# EAGLE board USB Switch PCB (EAGLE 8.3.2)
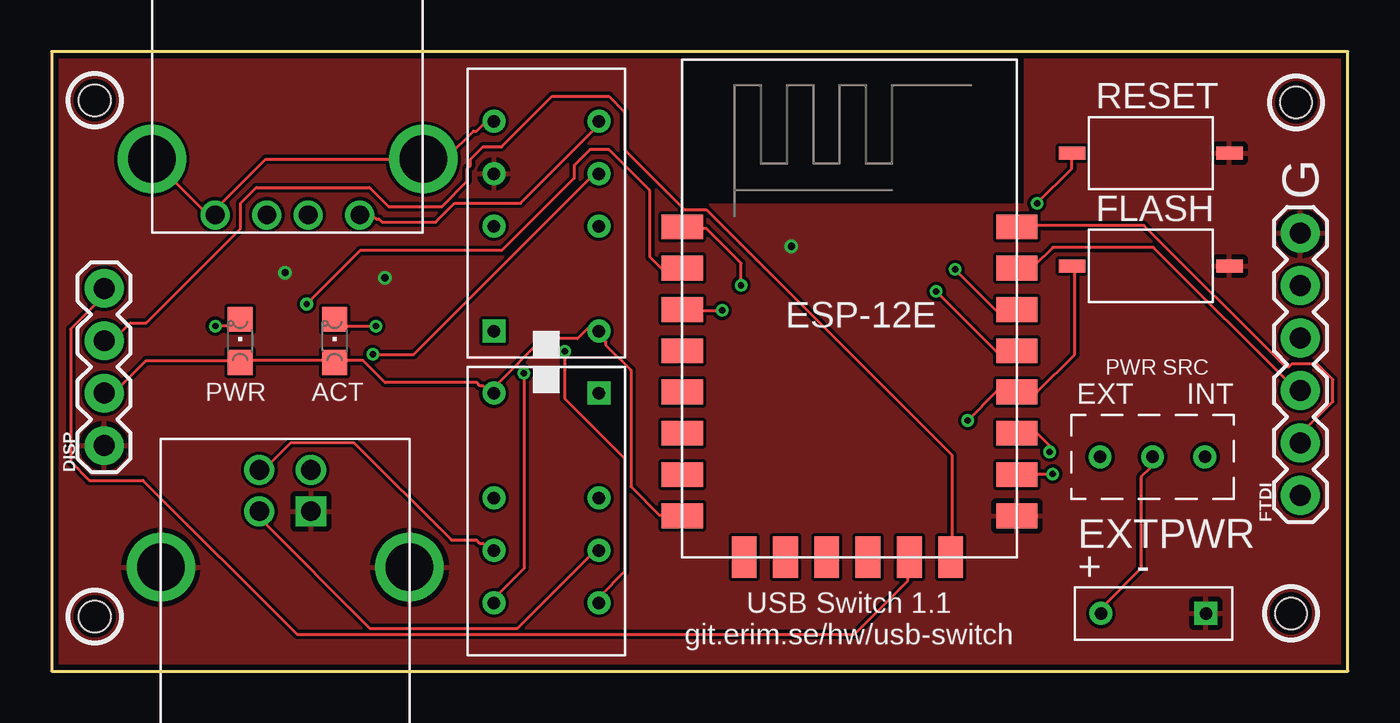
[diagram p0: board, top side]
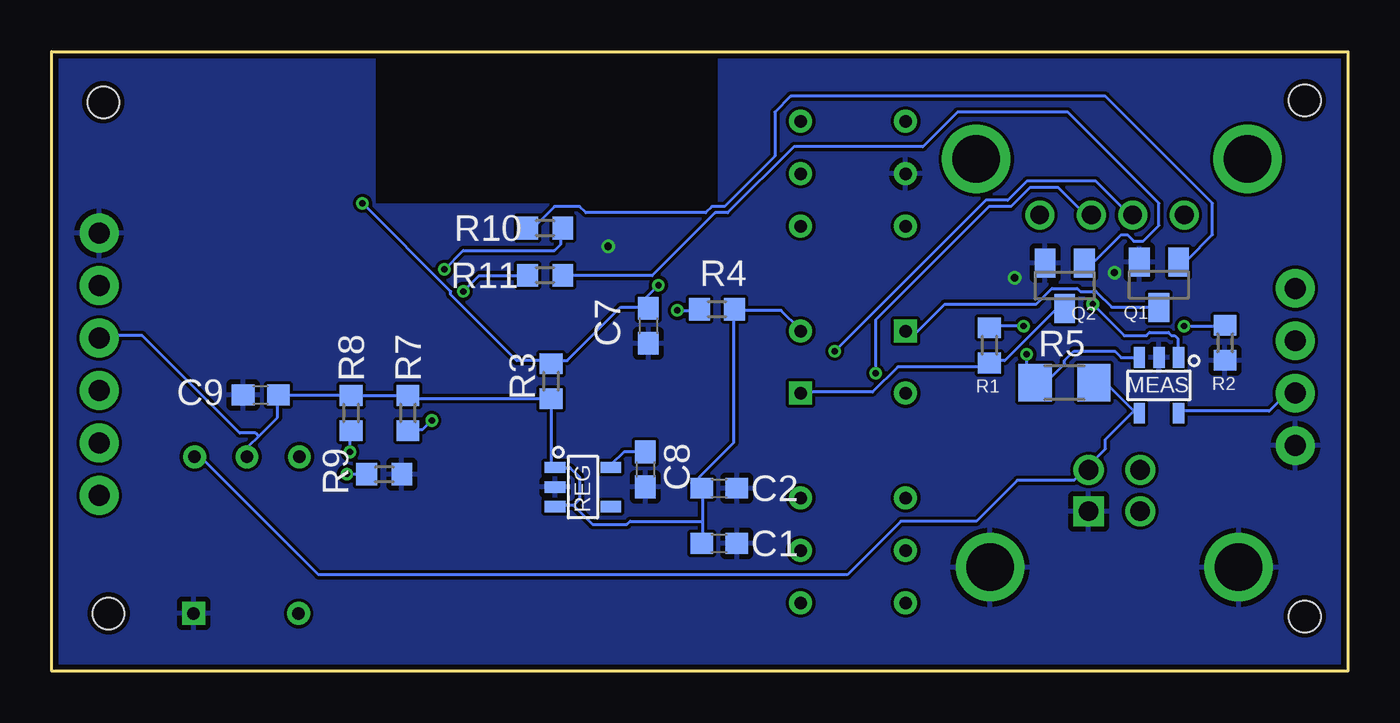
[diagram p1: board, bottom side, seen from below]

Size 62.75 x 30 mm. Coordinates in mm from the lower left corner, seen from the top.
Outline: 0,0 62.75,0 62.75,30 0,30 0,0
Copper layers (1*16): Top 0.035mm / dielectric 1.5mm / Bottom 0.035mm
Design rules "ITEADstudioDRC": minimum track width 6mil, minimum drill 12mil, track to track 6mil, track to pad 6mil, pad to pad 6mil, via to via 6mil, smd to smd 0mil, copper to edge 10mil, drill to drill 10mil, minimum pad ring 10mil, minimum via ring 6mil, stop-mask expansion 2mil, vias tented up to drill 100mil, thermal gap 10mil
Holes 1.52 mm at 2.08,27.65 59.99,2.8 2.08,2.65 60.24,27.55

## Footprints (pad centres in the part's own frame; a part is rotated, then mirrored left to right if it is on the bottom)
C0603 = smd 1.1 x 1: 1 -0.85,0; 2 0.85,0
EC2-5NU = drill 0.6: 1 2.54,-2.54; 3 2.54,2.54; 4 2.54,5.08; 5 2.54,7.62; 8 -2.54,7.62; 9 -2.54,5.08; 10 -2.54,2.54 | drill 0.6 square: 12 -2.54,-2.54
1X04 = drill 1.016 pad 1.88: 1 0,0; 2 2.54,0; 3 5.08,0; 4 7.62,0
TERMINAL-BLOCK = drill 0.6 square: N 2.54,0 | drill 0.6: P -2.54,0
MOMENTARY-SWITCH = smd 1.27 x 0.635: P$1 -3.81,0; P$2 3.81,0
1X06 = drill 1.016 pad 1.88: 1 0,0; 2 2.54,0; 3 5.08,0; 4 7.62,0; 5 10.16,0; 6 12.7,0
CHIPLED_0805 = smd 1.2 x 1.2: A 0,-1.05; C 0,1.05
ESP8266-ESP12E = smd 2 x 1.2: 1 -7.62,5.84; 2 -7.62,3.84; 3 -7.62,1.84; 4 -7.62,-0.16; 5 -7.62,-2.16; 6 -7.62,-4.16; 7 -7.62,-6.16; 8 -7.62,-8.16; 15 8.58,-8.16; 16 8.58,-6.16; 17 8.58,-4.16; 18 8.58,-2.16; 19 8.58,-0.16; 20 8.58,1.84; 21 8.58,3.84; 22 8.58,5.84 | smd 1.2 x 2: 9 -4.62,-10.16; 10 -2.62,-10.16; 11 -0.62,-10.16; 12 1.38,-10.16; 13 3.38,-10.16; 14 5.38,-10.16
SOT-23-5 = smd 1 x 0.55: 1 -1.35,0.95; 2 -1.35,0; 3 -1.35,-0.95; 4 1.35,-0.95; 5 1.35,0.95
SOT23 = smd 1 x 1.4: 1 -0.95,-1.1; 2 0.95,-1.1; 3 0,1.1
R0603 = smd 1 x 1.1: 1 -0.85,0; 2 0.85,0
R1206 = smd 1.6 x 1.803: 1 -1.422,0; 2 1.422,0
SWITCH = drill 0.6: O 0,0; P 2.54,0; S 5.08,0
USB-B = drill 0.95: 1 1.25,2; 2 -1.25,2; 3 -1.25,0 | drill 0.95 square: 4 1.25,0 | drill 2.3: P$1 -6.02,-2.71; P$2 6.02,-2.71
UE27-USBA = drill 0.9: D+ 1,0; D- -1,0; GND 3.5,0; VCC -3.5,0 | drill 2.3: P$0 -6.57,-2.71; P$1 6.57,-2.71

## Placement (x,y rotation side)
C1  100nF  [C0603]  30.43,6.19 0 bottom
C2  10µF  [C0603]  30.43,8.86 0 bottom
C7  100nF  [C0603]  33.86,16.73 270 bottom
C8  1µF  [C0603]  34.01,9.77 270 bottom
C9  1µF  [C0603]  52.62,13.37 180 bottom
DAT  EC2-5NUEC2-5NU  [EC2-5NU]  23.95,10.93 180 top
DISP  [1X04]  2.54,10.92 90 top
EXTPWR  TERMINAL-BLOCK  [TERMINAL-BLOCK]  53.34,2.79 0 top
FLASH  MOMENTARY-SWITCH  [MOMENTARY-SWITCH]  53.21,19.62 0 top
FTDI  [1X06]  60.45,8.51 90 top
LED1  ACT  [CHIPLED_0805]  13.7,15.99 0 top
LED2  PWR  [CHIPLED_0805]  9.12,15.99 0 top
MCU  [ESP8266-ESP12E]  38.14,15.68 0 top
MEAS  TCS888  [SOT-23-5]  9.14,13.84 270 bottom
PWR  EC2-5NUEC2-5NU  [EC2-5NU]  23.95,19.01 0 top
Q1  2N7002P  [SOT23]  9.15,18.71 180 bottom
Q2  2N7002P  [SOT23]  13.71,18.67 180 bottom
R1  1kΩ  [R0603]  17.36,15.78 90 bottom
R2  1kΩ  [R0603]  5.95,15.9 270 bottom
R3  12kΩ  [R0603]  38.58,14.04 90 bottom
R4  12kΩ  [R0603]  30.54,17.52 180 bottom
R5  82mΩ  [R1206]  13.72,13.97 0 bottom
R7  12kΩ  [R0603]  45.5,12.5 270 bottom
R8  12kΩ  [R0603]  48.25,12.5 270 bottom
R9  12kΩ  [R0603]  46.65,9.54 180 bottom
R10  100Ω  [R0603]  38.86,21.46 180 bottom
R11  100Ω  [R0603]  38.86,19.18 0 bottom
REG  MIC5504-3.3YM5SOT23  [SOT-23-5]  37.03,8.91 0 bottom
RESET  MOMENTARY-SWITCH  [MOMENTARY-SWITCH]  53.21,25.09 0 top
S1  SWITCH  [SWITCH]  55.84,10.38 180 top
USBIN  USB-B  [USB-B]  11.3,7.75 0 top
USBOUT  UE27-USBA  [UE27-USBA]  11.42,22.1 180 top

## Library data of the parts
C1 C2 C7-C9 R1-R5 R7-R11 = rcl
DAT EXTPWR FLASH MEAS PWR Q1 Q2 REG RESET S1 USBIN USBOUT = USB Switch PCB
DISP = SparkFun-Connectors; PROD_ID: CONN-09696
FTDI = SparkFun-Connectors
LED1 LED2 = led
MCU = ESP8266-ESP12E

## Nets
+3V3: C8.1 REG.5
+5V: C1.1 C2.1 C9.1 DAT.1 DISP.2 EXTPWR.P FTDI.4 LED1.A LED2.A MCU.8 MEAS.5 PWR.1 R3.1 R4.1 R7.1 R8.1 REG.1 REG.3 S1.P
ADC: MCU.2 MEAS.1
D+I: DAT.9 USBIN.3
D+O: DAT.8 USBOUT.D+
D-I: DAT.4 USBIN.2
D-O: DAT.5 USBOUT.D-
DATACOIL: DAT.12 Q2.3 R1.1
DATAGATE: Q2.1 R11.2
EN: MCU.3 R4.2
GND: C1.2 C2.2 C7.2 C8.2 C9.2 DISP.1 EXTPWR.N FLASH.P$2 FTDI.6 MCU.15 MEAS.2 PWR.9 Q1.2 Q2.2 R2.2 R9.1 REG.2 RESET.P$2 USBIN.4 USBIN.P$1 USBIN.P$2
GNDO: PWR.8 USBOUT.GND USBOUT.P$0 USBOUT.P$1
GPIO0: FLASH.P$1 MCU.18 R7.2
GPIO2: MCU.17 R8.2
GPIO15: MCU.16 R9.2
N$1: LED1.C R1.2
N$2: LED2.C R2.1
N$3: MCU.20 R10.1
N$5: MCU.19 R11.1
POWERCOIL: PWR.12 Q1.3
POWERGATE: Q1.1 R10.2
RST: C7.1 MCU.1 R3.2 RESET.P$1
RXD: FTDI.3 MCU.21
SCK: DISP.3 MCU.14
SDA: DISP.4 MCU.13
TXD: FTDI.2 MCU.22
VCCI: MEAS.4 R5.2 S1.O USBIN.1
VCCO: PWR.5 USBOUT.VCC
VCCU: MEAS.3 PWR.4 R5.1

## Tracks (layer width: path | path; a pad name or v marks a point on that pad's centre or on a via)
+3V3
  Bottom 0.152: REG.5 35.66,10.01 35.05,10.62 34.14,10.62 C8.1
+5V
  Top 0.152: DISP.2 2.59,13.51 3.05,13.51 4.57,15.04 8.99,15.04 LED2.A 9.14,15.04 13.56,15.04 LED1.A 13.72,15.04 15.09,15.04 16.15,13.97 20.57,13.97 20.73,13.82 20.88,13.82 21.34,13.36 DAT.1 21.49,13.51 21.49,13.82 23.77,16.1 25.45,16.1 25.91,16.56 26.36,16.56 PWR.1 26.36,16.41 26.82,15.95 26.82,15.8 28.04,14.58 28.04,8.94 29.41,7.57 30.48,7.57 MCU.8 | EXTPWR.P 50.9,2.85 50.9,3.15 52.73,4.98 52.73,9.4 53.19,9.86 53.19,10.31 S1.P
  Bottom 0.152: MEAS.5 8.08,12.6 3.81,12.6 3.05,13.36 2.59,13.36 DISP.2 | PWR.1 26.52,16.56 27.43,17.48 29.57,17.48 R4.1 29.72,17.48 29.72,11.07 31.39,9.4 31.39,8.94 C2.1 31.24,8.79 31.24,7.26 | 31.24,7.26 31.24,6.2 C1.1 | 37.49,8.03 38.25,8.03 REG.3 | 37.49,8.03 37.19,8.33 37.19,9.4 37.64,9.86 38.25,9.86 REG.1 38.41,9.86 38.56,10.01 38.56,13.06 R3.1 38.71,13.21 45.41,13.21 R7.1 45.57,13.36 48.16,13.36 R8.1 48.31,13.36 51.66,13.36 C9.1 51.82,13.36 51.82,12.29 52.73,11.38 | 31.24,7.26 34.75,7.26 34.9,7.11 36.58,7.11 37.49,8.03 | 52.73,11.38 53.19,10.92 53.19,10.46 S1.P | 52.73,11.38 52.88,11.53 53.65,11.53 58.37,16.26 60.35,16.26 FTDI.4
ADC  (via drill 0.3)
  Top 0.152: v12.34,17.78 14.94,20.37 21.79,20.37 25.3,23.88 25.3,24.49 26.06,25.25 26.98,25.25 28.96,23.27 28.96,20.07 29.57,19.46 30.48,19.46 MCU.2
  Bottom 0.152: v12.34,17.78 10.82,16.26 9.75,16.26 9.6,16.41 8.69,16.41 8.53,16.26 8.38,16.26 8.23,16.1 8.23,15.34 MEAS.1
D+I
  Top 0.152: DAT.9 26.36,5.74 26.21,5.74 22.55,2.08 15.39,2.08 10.06,7.42 10.06,7.72 USBIN.3
D+O  (via drill 0.3)
  Top 0.152: v24.84,15.49 24.84,13.21 27.74,10.31 27.74,4.83 26.52,3.61 26.52,3.45 DAT.8
  Bottom 0.152: v24.84,15.49 17.53,22.81 16.46,22.81 15.54,23.72 12.19,23.72 10.52,22.05 USBOUT.D+
D-I
  Top 0.152: DAT.4 21.34,5.89 21.18,5.89 20.88,6.2 20.73,6.2 20.57,6.35 19.36,6.35 14.63,11.07 11.58,11.07 10.36,9.86 10.06,9.86 USBIN.2
D-O  (via drill 0.3)
  Top 0.152: v22.86,14.43 22.86,4.98 21.49,3.61 21.49,3.45 DAT.5
  Bottom 0.152: v22.86,14.43 22.86,17.02 17.37,22.5 16.31,22.5 15.39,23.42 14.02,23.42 12.8,22.2 12.5,22.2 USBOUT.D-
DATACOIL
  Bottom 0.152: Q2.3 13.72,17.48 14.17,17.48 16.61,15.04 17.22,15.04 R1.1 17.37,14.88 17.53,14.73 21.79,14.73 23.01,13.51 26.36,13.51 DAT.12
DATAGATE
  Bottom 0.152: R11.2 37.95,19.15 33.68,19.15 30.63,22.2 30.02,22.2 26.82,25.4 20.57,25.4 18.9,27.08 13.56,27.08 9.14,22.66 9.14,21.59 9.91,20.83 10.36,20.83 10.67,21.13 10.97,21.13 12.19,19.91 12.65,19.91 Q2.1
EN  (via drill 0.3)
  Top 0.152: v32.46,17.48 30.63,17.48 MCU.3
  Bottom 0.152: v32.46,17.48 31.39,17.48 R4.2
GND  (via drill 0.35)
  other vias: 11.3,19.3 16.13,19.05 35.81,20.57
  pour Top: 0,0 0,30 62.75,30 62.75,0
  pour Bottom: 0,0 0,30 62.75,30 62.75,0
GNDO
  Top 0.152: PWR.8 21.34,26.62 21.03,26.62 20.57,26.16 20.42,26.16 19.2,24.94 18.14,24.94 USBOUT.P$0 17.98,24.79 10.36,24.79 7.77,22.2 | 7.77,22.2 7.47,22.2 4.88,24.79 USBOUT.P$1 | 7.77,22.2 USBOUT.GND
GPIO0  (via drill 0.3)
  Top 0.152: v44.35,12.14 45.72,13.51 46.63,13.51 MCU.18 46.79,13.51 47.7,13.51 49.53,15.34 49.53,19.61 FLASH.P$1
  Bottom 0.152: v44.35,12.14 44.81,11.68 45.41,11.68 R7.2
GPIO2  (via drill 0.3)
  Top 0.152: v48.31,10.62 48.31,10.92 47.7,11.53 46.79,11.53 MCU.17
  Bottom 0.152: v48.31,10.62 48.31,11.53 R8.2
GPIO15  (via drill 0.3)
  Top 0.152: v48.46,9.55 46.79,9.55 MCU.16
  Bottom 0.152: v48.46,9.55 47.55,9.55 R9.2
N$1  (via drill 0.3)
  Top 0.152: v15.7,16.71 14.02,16.71 13.72,17.02 LED1.C
  Bottom 0.152: v15.7,16.71 17.22,16.71 R1.2
N$2  (via drill 0.3)
  Top 0.152: v7.92,16.71 8.69,16.71 8.99,17.02 LED2.C
  Bottom 0.152: v7.92,16.71 6.1,16.71 R2.1
N$3  (via drill 0.3)
  Top 0.152: v43.74,19.46 45.72,17.48 46.63,17.48 MCU.20
  Bottom 0.152: v43.74,19.46 42.82,20.37 38.41,20.37 38.1,20.68 38.1,21.44 R10.1
N$5  (via drill 0.3)
  Top 0.152: v42.82,18.39 45.72,15.49 46.63,15.49 MCU.19
  Bottom 0.152: v42.82,18.39 42.06,19.15 39.78,19.15 R11.1
POWERCOIL
  Bottom 0.152: Q1.3 9.3,17.63 11.43,17.63 12.19,18.39 12.95,18.39 13.11,18.54 14.33,18.54 15.09,17.78 19.51,17.78 20.88,16.41 21.34,16.41 PWR.12
POWERGATE
  Bottom 0.152: R10.2 39.62,21.59 39.32,21.59 38.41,22.5 37.19,22.5 36.88,22.2 31.09,22.2 30.79,22.5 30.18,22.5 27.74,24.94 27.74,27.08 26.98,27.84 11.73,27.84 6.55,22.66 6.55,21.13 7.77,19.91 8.08,19.91 Q1.1
RST  (via drill 0.3)
  Top 0.152: v47.7,22.66 49.38,24.33 49.38,24.94 RESET.P$1 | v33.38,18.69 33.38,19.76 31.7,21.44 30.63,21.44 MCU.1
  Bottom 0.152: 33.98,17.63 35.2,17.63 37.8,15.04 38.56,15.04 R3.2 38.71,15.04 40.23,15.04 43.43,18.24 43.43,18.39 v47.7,22.66 | v33.38,18.69 33.98,18.09 33.98,17.63 | 33.98,17.63 C7.1
RXD
  Top 0.152: MCU.21 46.79,19.61 47.55,19.61 48.46,20.52 53.34,20.52 60.35,13.51 FTDI.3
SCK
  Top 0.152: MCU.14 43.59,5.59 43.59,10.46 31.7,22.35 30.63,22.35 27.74,25.25 27.74,27.08 26.98,27.84 24.23,27.84 21.79,25.4 20.88,25.4 20.27,24.79 20.27,24.49 20.12,24.33 20.12,23.72 18.9,22.5 16.31,22.5 15.39,23.42 9.91,23.42 9.14,22.66 9.14,21.44 4.57,16.87 3.81,16.87 3.05,16.1 2.59,16.1 DISP.3
SDA
  Top 0.152: MCU.13 41.45,5.44 41.45,4.37 38.86,1.78 11.89,1.78 4.42,9.25 1.83,9.25 0.91,10.16 0.91,16.56 2.44,18.09 2.44,18.54 DISP.4
TXD
  Top 0.152: MCU.22 46.79,21.59 52.88,21.59 59.74,14.73 59.89,14.73 60.05,14.88 61.27,14.88 62.03,14.12 62.03,13.06 60.5,11.53 60.5,11.07 FTDI.2
VCCI
  Bottom 0.152: 10.36,12.6 10.21,12.6 MEAS.4 10.36,12.6 | 10.36,12.6 11.73,13.97 R5.2 | 12.65,9.86 13.26,9.25 16,9.25 17.98,7.26 21.64,7.26 24.23,4.67 49.84,4.67 55.47,10.31 55.78,10.31 S1.O | 10.36,12.6 11.73,11.23 11.73,10.77 12.65,9.86 | 12.65,9.86 USBIN.1
VCCO
  Top 0.152: PWR.5 26.36,26.62 26.36,26.31 22.71,22.66 19.51,22.66 18.59,21.74 16,21.74 15.85,21.89 15.7,21.89 15.54,22.05 14.94,22.05 USBOUT.VCC
VCCU  (via drill 0.3)
  Top 0.152: v15.54,15.34 17.53,15.34 26.21,24.03 26.36,24.03 PWR.4
  Bottom 0.152: MEAS.3 10.21,15.19 10.97,15.19 11.28,15.49 13.26,15.49 13.72,15.04 13.72,14.88 14.63,13.97 R5.1 15.24,13.97 15.54,14.28 v15.54,15.34

## Text on the board
tPlace: G | PWR SRC | EXT | INT | EXTPWR / + - | USB Switch 1.1 / git.erim.se/hw/usb-switch